# EAGLE board CT_schematic (EAGLE 7.6.0)

Size 100 x 80 mm. Coordinates in mm from the lower left corner, seen from the top.
Outline: 0,0 100,0 100,80 0,80 0,0
Copper layers (1*16): Top 0.035mm / dielectric 1.5mm / Bottom 0.035mm
Design rules "default": minimum track width 10mil, minimum drill 24mil, track to track 8mil, track to pad 8mil, pad to pad 8mil, via to via 8mil, smd to smd 8mil, copper to edge 40mil, drill to drill 8mil, minimum pad ring 10mil, minimum via ring 8mil, stop-mask expansion 4mil, vias tented up to drill 0mil, thermal gap 10mil

## Footprints (pad centres in the part's own frame; a part is rotated, then mirrored left to right if it is on the bottom)
C0603 = smd 0.8 x 0.8: 1 -0.762,0; 2 0.762,0
C0402 = smd 0.5 x 0.5: 1 -0.508,0; 2 0.508,0
C0805 = smd 1.2 x 1.3: 1 -1.016,0; 2 1.016,0
C1206 = smd 1.3 x 1.6: 1 -1.524,0; 2 1.524,0
L0603 = smd 0.8 x 0.8: 1 -0.762,0; 2 0.762,0
DR1040 = smd 1.6 x 3.2: 1 -4.458,0; 2 4.458,0
R0603 = smd 0.8 x 0.8: 1 -0.762,0; 2 0.762,0
UFBGA100 = smd 0.28 x 0.28: A1 -2.75,2.75; A2 -2.25,2.75; A3 -1.75,2.75; A4 -1.25,2.75; A5 -0.75,2.75; A6 -0.25,2.75; A7 0.25,2.75; A8 0.75,2.75; A9 1.25,2.75; A10 1.75,2.75; A11 2.25,2.75; A12 2.75,2.75; B1 -2.75,2.25; B2 -2.25,2.25; B3 -1.75,2.25; B4 -1.25,2.25; B5 -0.75,2.25; B6 -0.25,2.25; B7 0.25,2.25; B8 0.75,2.25; B9 1.25,2.25; B10 1.75,2.25; B11 2.25,2.25; B12 2.75,2.25; C1 -2.75,1.75; C2 -2.25,1.75; C3 -1.75,1.75; C4 -1.25,1.75; C5 -0.75,1.75; C8 0.75,1.75; C9 1.25,1.75; C10 1.75,1.75; C11 2.25,1.75; C12 2.75,1.75; D1 -2.75,1.25; D2 -2.25,1.25; D3 -1.75,1.25; D10 1.75,1.25; D11 2.25,1.25; D12 2.75,1.25; E1 -2.75,0.75; E2 -2.25,0.75; E3 -1.75,0.75; E10 1.75,0.75; E11 2.25,0.75; E12 2.75,0.75; F1 -2.75,0.25; F2 -2.25,0.25; F11 2.25,0.25; F12 2.75,0.25; G1 -2.75,-0.25; G2 -2.25,-0.25; G11 2.25,-0.25; G12 2.75,-0.25; H1 -2.75,-0.75; H2 -2.25,-0.75; H3 -1.75,-0.75; H10 1.75,-0.75; H11 2.25,-0.75; H12 2.75,-0.75; J1 -2.75,-1.25; J2 -2.25,-1.25; J3 -1.75,-1.25; J10 1.75,-1.25; J11 2.25,-1.25; J12 2.75,-1.25; K1 -2.75,-1.75; K2 -2.25,-1.75; K3 -1.75,-1.75; K4 -1.25,-1.75; K5 -0.75,-1.75; K8 0.75,-1.75; K9 1.25,-1.75; K10 1.75,-1.75; K11 2.25,-1.75; K12 2.75,-1.75; L1 -2.75,-2.25; L2 -2.25,-2.25; L3 -1.75,-2.25; L4 -1.25,-2.25; L5 -0.75,-2.25; L6 -0.25,-2.25; L7 0.25,-2.25; L8 0.75,-2.25; L9 1.25,-2.25; L10 1.75,-2.25; L11 2.25,-2.25; L12 2.75,-2.25; M1 -2.75,-2.75; M2 -2.25,-2.75; M3 -1.75,-2.75; M4 -1.25,-2.75; M5 -0.75,-2.75; M6 -0.25,-2.75; M7 0.25,-2.75; M8 0.75,-2.75; M9 1.25,-2.75; M10 1.75,-2.75; M11 2.25,-2.75; M12 2.75,-2.75
XCVR_SPBTLE-RF = smd 1.6 x 1: 1 -6.75,0.33; 2 -6.75,-0.94; 3 -6.75,-2.21; 4 -6.75,-3.48; 5 -6.75,-4.75; 7 6.75,-4.75; 8 6.75,-3.48; 9 6.75,-2.21; 10 6.75,-0.94; 11 6.75,0.33 | smd 1 x 1.6: 6 -2.75,-5.75
TSC2014IYZGT = smd 0.3 x 0.3: A1 0,0; A2 0.5,0; A3 1,0; B1 0,-0.5; B2 0.5,-0.5; B3 1,-0.5; C1 0,-1; C2 0.5,-1; C3 1,-1; D1 0,-1.5; D2 0.5,-1.5; D3 1,-1.5
HTSS-105-01-G-D = drill 1 pad 1.8 square: 1 0,0 | drill 1 pad 1.8: 2 0,2.54; 3 2.54,0; 4 2.54,2.54; 5 5.08,0; 6 5.08,2.54; 7 7.62,0; 8 7.62,2.54; 9 10.16,0; 10 10.16,2.54
FCI_10118193-0001LF = smd 0.4 x 1.35: 1 -1.3,2.675; 2 -0.65,2.675; 3 0,2.675; 4 0.65,2.675; 5 1.3,2.675 | smd 1.6 x 1.4: 6 -3.2,2.45; 7 3.2,2.45 | smd 1.9 x 1.9: 8 -1.2,0; 9 1.2,0 | hole 0.5: -3.3,0; 3.3,0
SOT143B = smd 1 x 0.7: 1 -0.75,-1 | smd 0.6 x 0.7: 2 0.95,-1; 3 0.95,1; 4 -0.95,1
ABS07-32.768KHZ-7-T = smd 1.1 x 2.4: 1 -2.5,0; 2 0,0
ABLS-25.000MHZ-B2F-T = smd 5.6 x 2.8: 1 -3.81,0; 2 5.69,0
TSOT-23-5 = smd 1.3 x 0.62: 1 -1.31,0.95; 2 -1.31,0; 3 -1.31,-0.95; 4 1.31,-0.95; 5 1.31,0.95
DFN8_2X3MC = smd 0.813 x 0.305: 1 -1.398,0.75; 2 -1.398,0.25; 3 -1.398,-0.25; 4 -1.398,-0.75; 5 1.398,-0.75; 6 1.398,-0.25; 7 1.398,0.25; 8 1.398,0.75 | smd 1.753 x 1.549: 9 0,0
JST-2-SMD = smd 1 x 4.6: 1 -1,-3.7; 2 1,-3.7 | smd 1.6 x 3.4: NC1 -3.4,1.5; NC2 3.4,1.5
SON-6 = smd 0.55 x 0.3: 1 -0.355,0.5 | smd 0.52 x 0.3: 2 -0.37,0; 3 -0.37,-0.5; 4 0.37,-0.5; 5 0.37,0; 6 0.37,0.5
SW_4-1437565-2 = smd 1.4 x 2.1: 1 -2.23,4.55; 2 -2.23,-4.55; 3 2.23,4.55; 4 2.23,-4.55
LGM67K-G1J2-24-Z = smd 0.8 x 1.4: A -2,0; C 0,0
NC7SZ125M5X = smd 1.3 x 0.7: 1 -1.3,0.95; 2 -1.3,0; 3 -1.3,-0.95; 4 1.3,-0.95; 5 1.3,0.95

## Placement (x,y rotation side)
C1  1e-07  [C0603]  -53.34,53.34 0 top  (outside the outline)
C2  1e-07  [C0603]  -57.15,53.34 0 top  (outside the outline)
C3  1e-07  [C0603]  -60.96,53.34 0 top  (outside the outline)
C4  1e-07  [C0603]  -64.77,53.34 0 top  (outside the outline)
C5  1e-07  [C0603]  -15.24,58.42 0 top  (outside the outline)
C6  4.7e-06  [C0603]  -49.53,53.34 0 top  (outside the outline)
C7  1e-07  [C0603]  -19.05,58.42 0 top  (outside the outline)
C8  1e-08  [C0603]  -22.86,58.42 0 top  (outside the outline)
C9  1e-06  [C0603]  -26.67,58.42 0 top  (outside the outline)
C10  1e-11  [C0402]  -64.77,58.42 0 top  (outside the outline)
C11  1e-11  [C0402]  -15.24,63.5 0 top  (outside the outline)
C12  1e-11  [C0402]  -19.05,63.5 0 top  (outside the outline)
C13  1e-11  [C0402]  -22.86,63.5 0 top  (outside the outline)
C14  1e-06  [C0603]  -30.48,58.42 0 top  (outside the outline)
C15  1e-07  [C0402]  -26.67,63.5 0 top  (outside the outline)
C16  1e-07  [C0402]  -30.48,63.5 0 top  (outside the outline)
C17  1e-06  [C0603]  -34.29,58.42 0 top  (outside the outline)
C18  1e-05  [C0805]  -15.24,48.26 0 top  (outside the outline)
C19  1e-05  [C0805]  -20.32,48.26 0 top  (outside the outline)
C20  1e-07  [C0402]  -34.29,63.5 0 top  (outside the outline)
C21  1e-05  [C1206]  -43.18,41.91 0 top  (outside the outline)
C22  1e-05  [C1206]  -49.53,41.91 0 top  (outside the outline)
C23  1e-08  [C0402]  -38.1,63.5 0 top  (outside the outline)
C24  1e-08  [C0402]  -41.91,63.5 0 top  (outside the outline)
F1  240.0  [L0603]  -38.1,58.42 0 top  (outside the outline)
I1  7e-06  [DR1040]  -19.05,24.13 0 top  (outside the outline)
R2  1000.0  [R0603]  -41.91,58.42 0 top  (outside the outline)
R4  4700.0  [R0603]  -45.72,58.42 0 top  (outside the outline)
R5  4700.0  [R0603]  -49.53,58.42 0 top  (outside the outline)
R6  2200.0  [R0603]  -53.34,58.42 0 top  (outside the outline)
R7  2200.0  [R0603]  -57.15,58.42 0 top  (outside the outline)
R8  10000.0  [R0603]  -58.42,48.26 0 top  (outside the outline)
R9  10000.0  [R0603]  -63.5,48.26 0 top  (outside the outline)
R10  100000.0  [R0603]  -38.1,48.26 0 top  (outside the outline)
R11  47000.0  [R0603]  -15.24,53.34 0 top  (outside the outline)
R12  10000.0  [R0603]  -20.32,53.34 0 top  (outside the outline)
R13  10000.0  [R0603]  -25.4,53.34 0 top  (outside the outline)
R14  490000.0  [R0603]  -43.18,48.26 0 top  (outside the outline)
R15  1000000.0  [R0603]  -33.02,48.26 0 top  (outside the outline)
R16  10000.0  [R0603]  -30.48,53.34 0 top  (outside the outline)
R17  10000.0  [R0603]  -35.56,53.34 0 top  (outside the outline)
R18  82000.0  [R0603]  -40.64,53.34 0 top  (outside the outline)
R19  300000.0  [R0603]  -48.26,48.26 0 top  (outside the outline)
R20  120000.0  [R0603]  -53.34,48.26 0 top  (outside the outline)
R21  2000.0  [R0603]  -60.96,58.42 0 top  (outside the outline)
R22  10000.0  [R0603]  -45.72,53.34 0 top  (outside the outline)
U1  STM32L151V8H6A  [UFBGA100]  -63.5,6.35 0 top  (outside the outline)
U2  SPBTLE-RF  [XCVR_SPBTLE-RF]  -21.59,10.16 0 top  (outside the outline)
U3  TSC2014IYZGT  [TSC2014IYZGT]  -38.1,43.18 0 top  (outside the outline)
U4  HTSS-105-01-G-D  [HTSS-105-01-G-D]  -54.61,21.59 0 top  (outside the outline)
U5  10118193-0001LF  [FCI_10118193-0001LF]  -19.05,33.02 0 top  (outside the outline)
U6  prtr5v0u2ax  [SOT143B]  -54.61,63.5 0 top  (outside the outline)
U7  ABS07-32.768KHZ-7-T  [ABS07-32.768KHZ-7-T]  -60.96,33.02 0 top  (outside the outline)
U8  ABLS-25.000MHZ-B2F-T  [ABLS-25.000MHZ-B2F-T]  -38.1,34.29 0 top  (outside the outline)
U9  ltc3406es5  [TSOT-23-5]  -25.4,48.26 0 top  (outside the outline)
U10  MCP73831T-2ACI/MC  [DFN8_2X3MC]  -15.24,67.31 0 top  (outside the outline)
U11  S2B-PH-SM4-TB(LF)(SN)  [JST-2-SMD]  -34.29,25.4 0 top  (outside the outline)
U12  TPS3895ADRYR  [SON-6]  -58.42,62.23 0 top  (outside the outline)
U13  4-1437565-2  [SW_4-1437565-2]  -45.72,6.35 0 top  (outside the outline)
U14  Q65110A2395  [LGM67K-G1J2-24-Z]  -17.78,41.91 0 top  (outside the outline)
U15  nc7sz125m5x  [NC7SZ125M5X]  -54.61,40.64 0 top  (outside the outline)
U16  nc7sz125m5x  [NC7SZ125M5X]  -60.96,40.64 0 top  (outside the outline)

## Library data of the parts
C1-C24 F1 I1 R2 R4-R22 U1-U16 = circuit_tree

## Nets
CLK_CRYSTAL_U1_D1: C10.1 U1.D1 U7.1
CLK_CRYSTAL_U1_E1: C11.1 U1.E1 U7.2
CLK_CRYSTAL_U1_F1: C12.1 U1.F1 U8.1
CLK_CRYSTAL_U1_G1: C13.1 U1.G1 U8.2
GND: C1.2 C2.2 C3.2 C4.2 C5.2 C6.2 C7.2 C8.2 C9.2 C10.2 C11.2 C12.2 C13.2 C14.2 C15.2 C16.2 C17.2 C18.2 C19.1 C19.2 C20.2 C21.2 C22.2 C23.2 C24.2 R2.2 R8.2 R10.2 R11.2 R14.2 R18.2 R20.2 R21.2 U1.D3 U1.E3 U1.F2 U1.F11 U1.F12 U1.J1 U1.K1 U2.6 U3.B2 U3.D2 U4.9 U5.5 U5.6 U5.7 U5.8 U5.9 U6.1 U9.2 U10.6 U10.9 U11.2 U12.2 U14.C U15.1 U15.3 U16.1 U16.3
INPUT_USBPOWER_5V: C21.1 R22.2 U5.1 U6.4 U10.1 U10.2
NET_U1_A3: R6.1 U1.A3 U3.D1
NET_U1_A4: R8.1 U1.A4
NET_U1_B3: R7.1 U1.B3 U3.C1
NET_U1_E2: C7.1 U1.E2
NET_U1_H2: R5.1 U1.H2 U16.4
NET_U1_M1: C8.1 C9.1 F1.1 U1.L1 U1.M1
NET_U1_M11: U14.A
NET_U1_M12: U13.3 U13.4
NET_U2_11: R4.1 U2.11 U15.4
NET_U3_B1: R13.1 U3.B1
NET_U3_C2: R12.1 U3.C2
NET_U4_3: U3.B3 U4.3
NET_U4_4: U3.D3 U4.4
NET_U4_5: U3.A3 U4.5
NET_U4_6: U3.C3 U4.6
NET_U9_1: U9.1
NET_U9_3: I1.1 U9.3
NET_U9_5: R14.1 R15.1 U9.5
NET_U9_ATNET_3: I1.2 R15.2
NET_U10_5: R22.1 U10.5
NET_U10_8: R21.1 U10.8
NET_U12_1: R17.1 R18.1 U12.1
NET_U12_3: R19.2 R20.1 U12.3
NET_U12_4: R16.1 U12.4 U15.2 U16.2
NET_U13_1: R2.1 U13.1 U13.2
PROC_GPIO_TO_U2_SPI_IRQ: R11.1 U1.A1 U2.4
PROC_SPI1_MISO: U1.A7 U2.8
PROC_SPI1_MOSI: U1.C5 U2.9
PROC_SPI1_NSS: R9.1 U1.A9 U2.10
PROC_SPI1_SCK: R10.1 U1.A8 U2.7
PROC_USB_DM: U1.B12 U5.2 U6.3
PROC_USB_DP: U1.A12 U5.3 U6.2
VCC_S1_3V7: C18.1 C22.1 U9.4 U10.3 U10.4 U11.1
VCC_TIER1_1V8: C1.1 C2.1 C3.1 C4.1 C5.1 C6.1 C14.1 C15.1 C16.1 C17.1 C19.2 C20.1 C23.1 C24.1 F1.2 I1.2 R4.2 R5.2 R6.2 R7.2 R9.2 R12.2 R13.2 R15.2 R16.2 R17.2 R19.1 U1.C4 U1.G2 U1.G11 U1.G12 U1.H3 U2.5 U3.A2 U12.6 U15.5 U16.5

## Tracks (layer width: path | path; a pad name or v marks a point on that pad's centre or on a via)
CLK_CRYSTAL_U1_D1  (2 unrouted)
CLK_CRYSTAL_U1_E1  (2 unrouted)
CLK_CRYSTAL_U1_F1  (2 unrouted)
CLK_CRYSTAL_U1_G1  (2 unrouted)
GND  (59 unrouted)
INPUT_USBPOWER_5V  (5 unrouted)
NET_U1_A3  (2 unrouted)
NET_U1_A4  (1 unrouted)
NET_U1_B3  (2 unrouted)
NET_U1_E2  (1 unrouted)
NET_U1_H2  (2 unrouted)
NET_U1_M1  (4 unrouted)
NET_U1_M12  (1 unrouted)
NET_U2_11  (2 unrouted)
NET_U3_B1  (1 unrouted)
NET_U3_C2  (1 unrouted)
NET_U4_3  (1 unrouted)
NET_U4_4  (1 unrouted)
NET_U4_5  (1 unrouted)
NET_U4_6  (1 unrouted)
NET_U9_3  (1 unrouted)
NET_U9_5  (2 unrouted)
NET_U9_ATNET_3  (1 unrouted)
NET_U10_5  (1 unrouted)
NET_U10_8  (1 unrouted)
NET_U12_1  (2 unrouted)
NET_U12_3  (2 unrouted)
NET_U12_4  (3 unrouted)
NET_U13_1  (2 unrouted)
PROC_GPIO_TO_U2_SPI_IRQ  (2 unrouted)
PROC_SPI1_MISO  (1 unrouted)
PROC_SPI1_MOSI  (1 unrouted)
PROC_SPI1_NSS  (2 unrouted)
PROC_SPI1_SCK  (2 unrouted)
PROC_USB_DM  (2 unrouted)
PROC_USB_DP  (2 unrouted)
VCC_S1_3V7  (5 unrouted)
VCC_TIER1_1V8  (36 unrouted)